# Altium PCB Multivibrator.PcbDoc
Units mm, origin at the board's own origin, x right, y up, seen from the top; angles counter-clockwise.
Board outline 30 x 30 mm, 2 copper layers (Top Layer, Bottom Layer); 9 components, 6 nets, 20 pads, 0 vias.
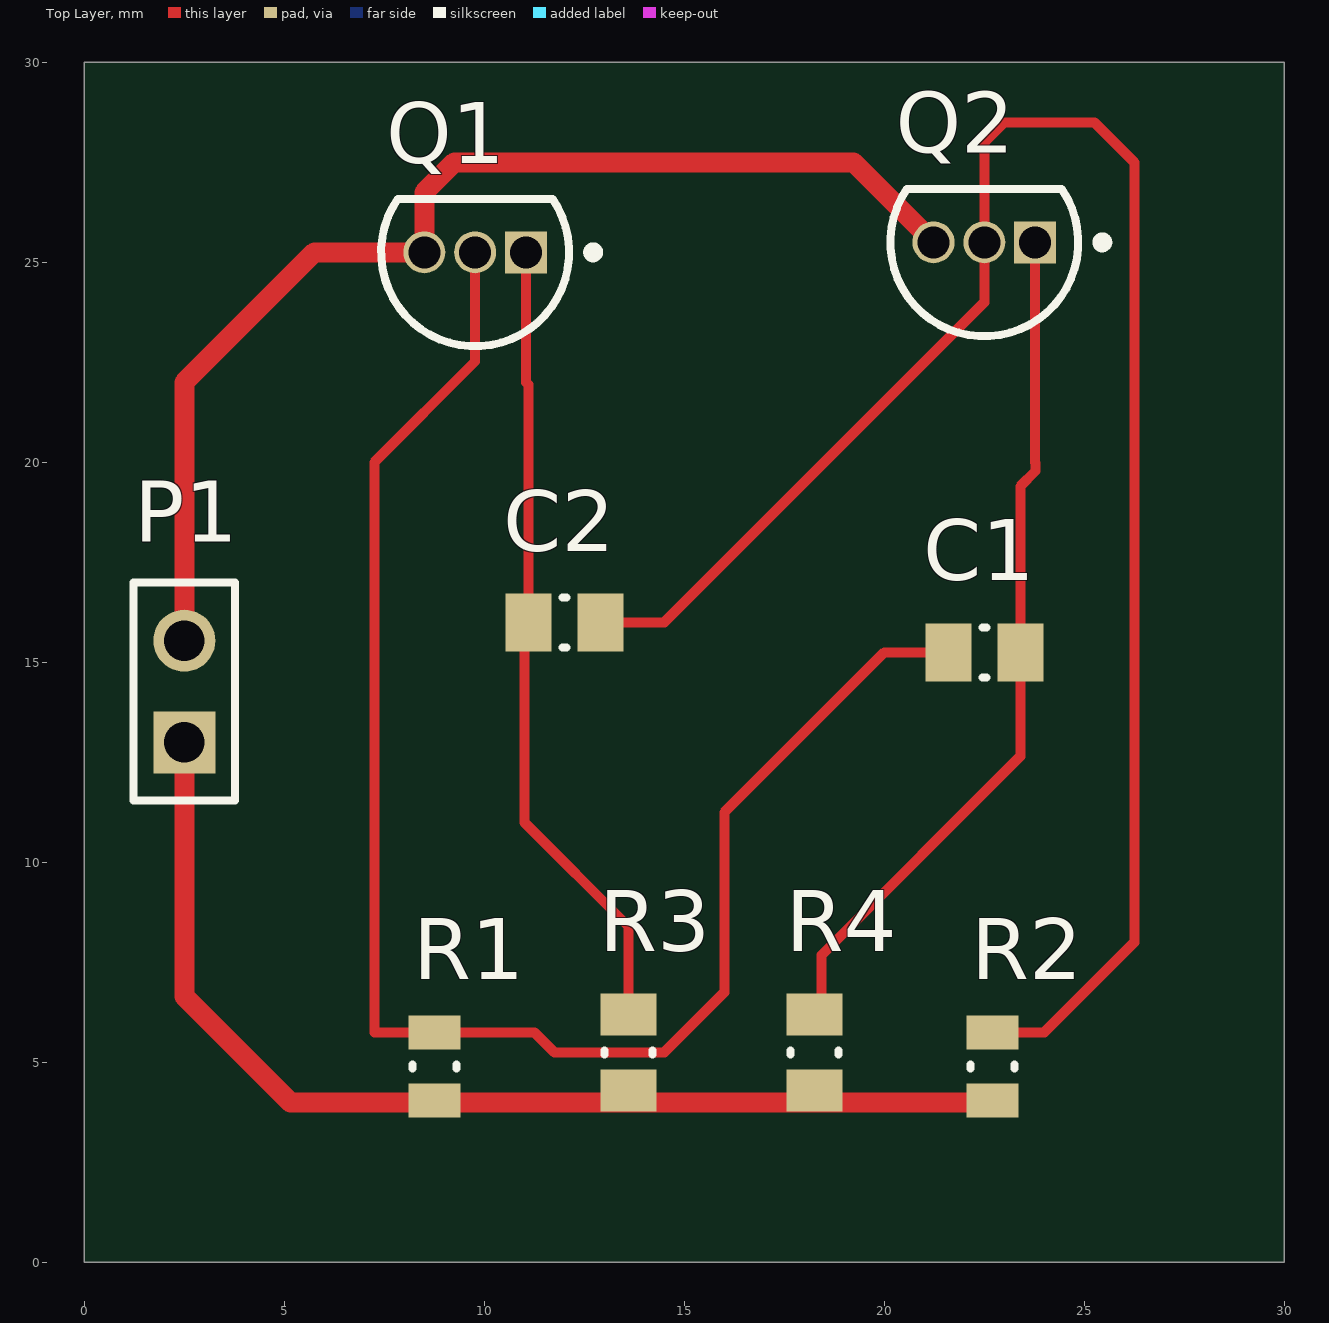
[diagram p0: Top Layer view]
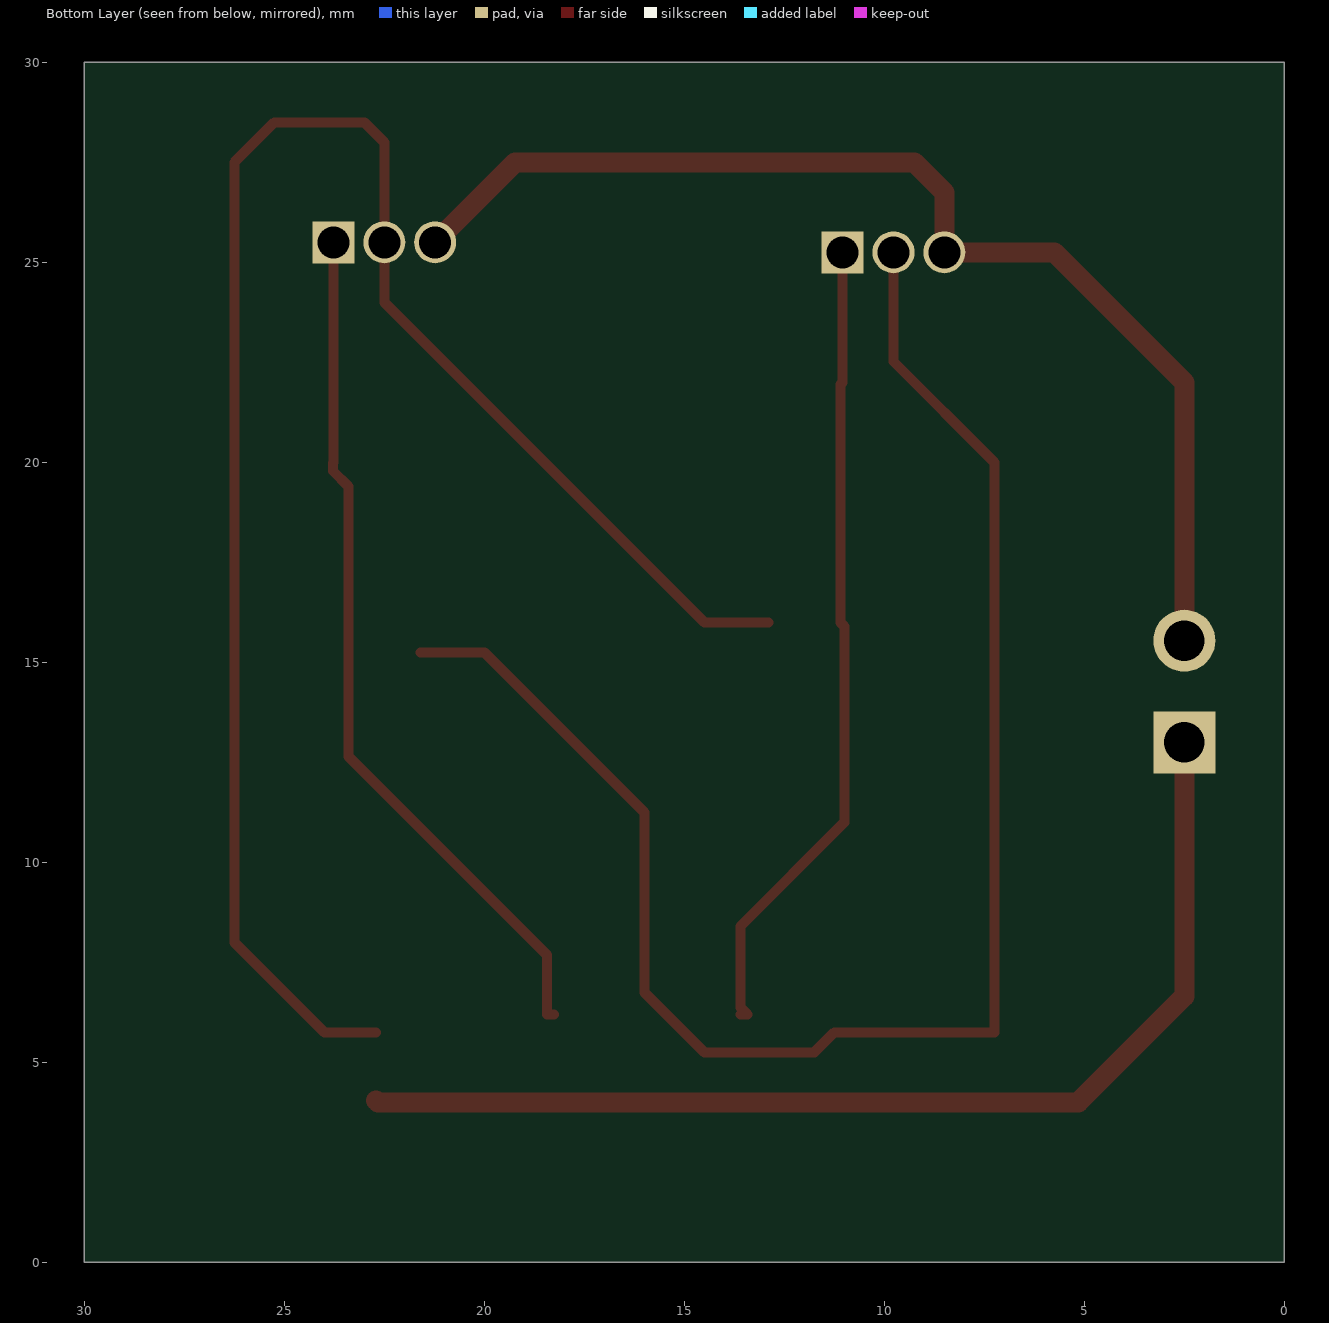
[diagram p1: Bottom Layer view, seen from below]

## Layer stack, top to bottom
Top Solder: solder mask 0.0102, Solder Resist, Dk 3.5
Top Layer: signal copper 0.0356
Dielectric 1: dielectric 0.32, FR-4, Dk 4.8
Bottom Layer: signal copper 0.0356
Bottom Solder: solder mask 0.0102, Solder Resist, Dk 3.5

## Board outline
0,0 30,0 30,30 0,30

## Design rules (kind name [scope] priority, off if disabled: settings)
AssemblyTestPointUsage [All] p1 off:
AssemblyTestpoint [All] p1 off: testpointundercomponent=TRUE minsize=1.016 maxsize=2.54 preferedsize=1.524 minholesize=0 maxholesize=1.016 preferedholesize=0.813 testpointgrid=0.025 usegrid=TRUE gridtolerance=0 allowsidetop=TRUE allowsidebottom=TRUE
Clearance [All] p1: gap=0.25 ignorepadtopadclearanceinfootprint=FALSE except(0.22: THPad-THPad)
FabricationTestPointUsage [All] p1 off: valid=0 allowmultiple=FALSE
FabricationTestpoint [All] p1 off: side=3 testpointundercomponent=TRUE minsize=1.016 maxsize=2.54 preferedsize=1.524 minholesize=0 maxholesize=1.016 preferedholesize=0.813 testpointgrid=0.025 allowsidetop=TRUE allowsidebottom=TRUE usegrid=TRUE gridtolerance=0
MinimumSolderMaskSliver [All] p1: minsoldermaskwidth=0.22
PolygonConnect [All] p1: connectstyle=Relief reliefconductorwidth=0.254 reliefentries=4 polygonreliefangle="90 Angle" airgapwidth=0.254
RoutingVias [All] p1: holewidth=0.6 width=1 viastyle="Through Hole" minholewidth=0.6 minwidth=1 maxholewidth=0.6 maxwidth=1
SilkToSolderMaskClearance [IsPad] p1: minsilkscreentomaskgap=0.175 clearancetoexposedcopper=TRUE
SolderMaskExpansion SolderMaskExpansion_Transistor [HasFootprint('ONSC-TO-92-3-29-11')] p1: expansion=0
SolderMaskExpansion [All] p2: expansion=0.102
Width Width_Power [(InNet('12V') OR InNet('GND'))] p1: maxlimit=0.5 minlimit=0.25 preferedwidth=0.5
Width [All] p2: maxlimit=0.25 minlimit=0.25 preferedwidth=0.25 minimp=50.000000 maximp=50.000000 favimp=50.000000
24 further rules are at their usual default settings.

## Components (designator, comment, footprint, x,y, rotation, side; value= is the part's Value field where it differs from the comment)
C1 "CAP 22nF 16V 0805(2012)" CAPC0805(2012)145_N 22.5,15.25 r0 top value=22nF
C2 "CAP 22nF 16V 0805(2012)" CAPC0805(2012)145_N 12,16 r0 top value=22nF
P1 "TSW-102-26-G-S" SMTC-TSW-102-26-XX-S 2.5,13 r90 top
Q1 "BC547C" ONSC-TO-92-3-29-11 9.77,25.25 r180 top
Q2 "BC547C" ONSC-TO-92-3-29-11 22.5,25.5 r180 top
R1 "100K 5% 0805(2012)" RESC0805(2012)_L 8.75,4.9 r90 top value="100000.00 Ohm"
R2 "100K 5% 0805(2012)" RESC0805(2012)_L 22.703,4.9 r90 top value="100000.00 Ohm"
R3 "1K 5% 0805(2012)" RESC0805(2012)_N 13.601,5.25 r270 top value="1000.00 Ohm"
R4 "1K 5% 0805(2012)" RESC0805(2012)_N 18.252,5.25 r270 top value="1000.00 Ohm"

## Footprints (in the part's own frame and the unit in brackets; to place one, negate y for a bottom-side part, rotate by r counter-clockwise, add the part's x,y. Pads: shape width x height; smd on the part's side, far side on the other; paste and mask are expansions set on the pad)
CAPC0805(2012)145_N [mm] "Chip Capacitor, Body 2.0x1.2mm, Height 1.45mm, IPC Medium Density"
  rect 1.15x1.45 smd: 1(-0.9,0) 2(0.9,0)
  silkscreen extent -0.05,-0.62 0.05,0.63, body extent -1.1,-0.72 1.1,0.73, height 1.45
ONSC-TO-92-3-29-11 [mm] "TO, 3-Leads, Body Dia 4.7mm, Pitch 1.27mm"
  rect 1.05x1.05 hole 0.8: 1(-1.27,0)
  round 1.05 hole 0.8: 2(0,0) 3(1.27,0)
  silkscreen extent -3.08,-1.34 2.35,2.35, body extent -2.35,-1.33 2.36,2.36, height 7.87
RESC0805(2012)_L [mm] "Chip Resistor, Body 2.0x1.3mm, IPC High Density"
  rect 0.85x1.3 smd: 1(-0.85,0) 2(0.85,0)
  silkscreen extent -0.05,-0.55 0.05,0.55, body extent -1.1,-0.67 1.1,0.68, height 0.7
RESC0805(2012)_N [mm] "Chip Resistor, Body 2.0x1.3mm, IPC Medium Density"
  rect 1.05x1.4 smd: 1(-0.95,0) 2(0.95,0)
  silkscreen extent -0.05,-0.6 0.05,0.6, body extent -1.1,-0.67 1.1,0.68, height 0.7
SMTC-TSW-102-26-XX-S [mm] ".025 SQ Post Terminal Strip Assembly, 1x2 Pins, Vertical, 2.54mm Pitch, Male"
  rect 1.55x1.55 hole 1.02: 1(0,0)
  round 1.55 hole 1.02: 2(2.54,0)
  silkscreen extent -1.46,-1.27 4,1.27, body extent -1.4,-1.27 3.81,1.27, height 8.38

## Part data
C1 C2: library part CMP-1036-04042-1, "CAP 22nF 16V ±10% 0805 (2012 Metric) Thickness 1.45mm SMD", Case-EIA=0805, Case-Metric=2012, Rated Voltage="16 V", Tolerance=±10%, Max Thickness="1.45 mm", Technology=SMT
P1: library part CMP-1024-00327-1, Manufacturer=Samtec, Temperature Range="-55 to 125 degC", ComponentLink1Description="Manufacturer URL", ComponentLink1URL=http://www.samtec.com, ComponentLink2Description=Datasheet, ComponentLink2URL=http://www.samtec.com/documents/webfiles/pdf/TSW_TH.PDF, ComponentLink3Description="Package Specification", ComponentLink3URL=http://www.samtec.com/documents/webfiles/cpdf/TSW-XXX-XX-XXX-X-XX-XXX-MKT.pdf, DatasheetVersion=F-214, Mounting Technology=Through-hole, Orientation=Vertical, PackageDescription=".025[0.64] SQ. Post Terminal Strip Assembly", PackageReference=TSW-102-26-XX-S, PackageVersion="DM, 8/1988", PartNumber=TSW-102-26-G-S, Pitch="2.54 mm", RoHS=True
Q1 Q2: library part CMP-1048-01437-1, "Amplifier Transistor, NPN Silicon, 3-Pin TO-92, Bulk Box", Manufacturer="On Semiconductor", ComponentLink1Description="Manufacturer URL", ComponentLink1URL=http://www.onsemi.com/, ComponentLink2Description=Datasheet, ComponentLink2URL=http://www.onsemi.com/pub_link/Collateral/BC546-D.PDF, ComponentLink3Description="Package Specification", ComponentLink3URL=http://www.onsemi.cn/pub_link/Collateral/2N6426-D.PDF, DatasheetVersion="Rev. 7", fT Min (MHz)=150, IC Continuous (A)=0.1, Mounting Technology="Through Hole", PackageDescription="3-Pin Transistor Outline, Body 4.825 x 3.685 mm, Pitch 1.27 mm", PackageReference=TO-92-3-29-11_AM_SL, PackageVersion="Rev. AM", Packing="Bulk Box", PartNumber=BC547C, Polarity=NPN, RoHS=FALSE
R1 R2: library part CMP-1013-00122-1, "100K 0.125W 5% 0805 (2012 Metric)  SMD", Case-EIA=0805, Case-Metric=2012, Power="0.125 W", Tolerance="5 %", Technology=SMT
R3 R4: library part CMP-1013-00074-1, "1K 0.125W 5% 0805 (2012 Metric)  SMD", Case-EIA=0805, Case-Metric=2012, Power="0.125 W", Tolerance="5 %", Technology=SMT

## Nets (pads, with @x,y where several pads share a name; then routed paths per layer and width w, separated by ;. In a path a pad name is that pad's centre, name@x,y a point inside that pad or via, vN(x,y) a via of type N, cw(c..) or ccw(c..) an arc to the next point about the centre after c; other vN are vias at no path point)
12V: P1.1 R1.1 R2.1 R3.2 R4.2 | length 27.7
  Top Layer w0.5: P1.1 2.5,6.65 5.15,4 22.653,4 R2.1
GND: P1.2 Q1.3 Q2.3 | length 28.9
  Top Layer w0.5: P1.2 2.5,22 5.75,25.25 Q1.3@8.25,25.25 ; Q1.3 8.5,26.75 9.25,27.5 19.23,27.5 Q2.3
NetC1_1: C1.1 Q1.2 R1.2 | length 41.9
  Top Layer w0.25: Q1.2 9.77,22.52 7.25,20 7.25,5.75 R1.2 11.25,5.75 11.75,5.25 14.5,5.25 16,6.75 16,11.25 20,15.25 C1.1
NetC1_2: C1.2 Q2.1 R4.1 | length 21.7
  Top Layer w0.25: R4.1 18.427,6.2 18.427,7.677 23.4,12.65 C1.2 23.4,19.4 23.781,19.781 23.781,19.989 23.77,20 Q2.1
NetC2_1: C2.1 Q1.1 R3.1 | length 20.4
  Top Layer w0.25: Q1.1 11.04,22 11.1,21.94 C2.1 11,15.9 11,11 13.601,8.399 13.601,6.375 13.426,6.2 R3.1
NetC2_2: C2.2 Q2.2 R2.2 | length 45.3
  Top Layer w0.25: C2.2 14.5,16 22.5,24 Q2.2 22.5,28 23,28.5 25.25,28.5 26.25,27.5 26.25,8 24,5.75 R2.2